# Altium PCB OrientationBoard_LIS303_LIS2DM_L3GD20.PcbDoc
Units mm, origin at the board's own origin, x right, y up, seen from the top; angles counter-clockwise.
Board outline 44 x 44 mm, 2 copper layers (Top Layer, Bottom Layer), stack 1.571 mm thick; 36 components, 25 nets, 178 pads, 35 vias.
Unrouted connection lines stored in the file: 13.
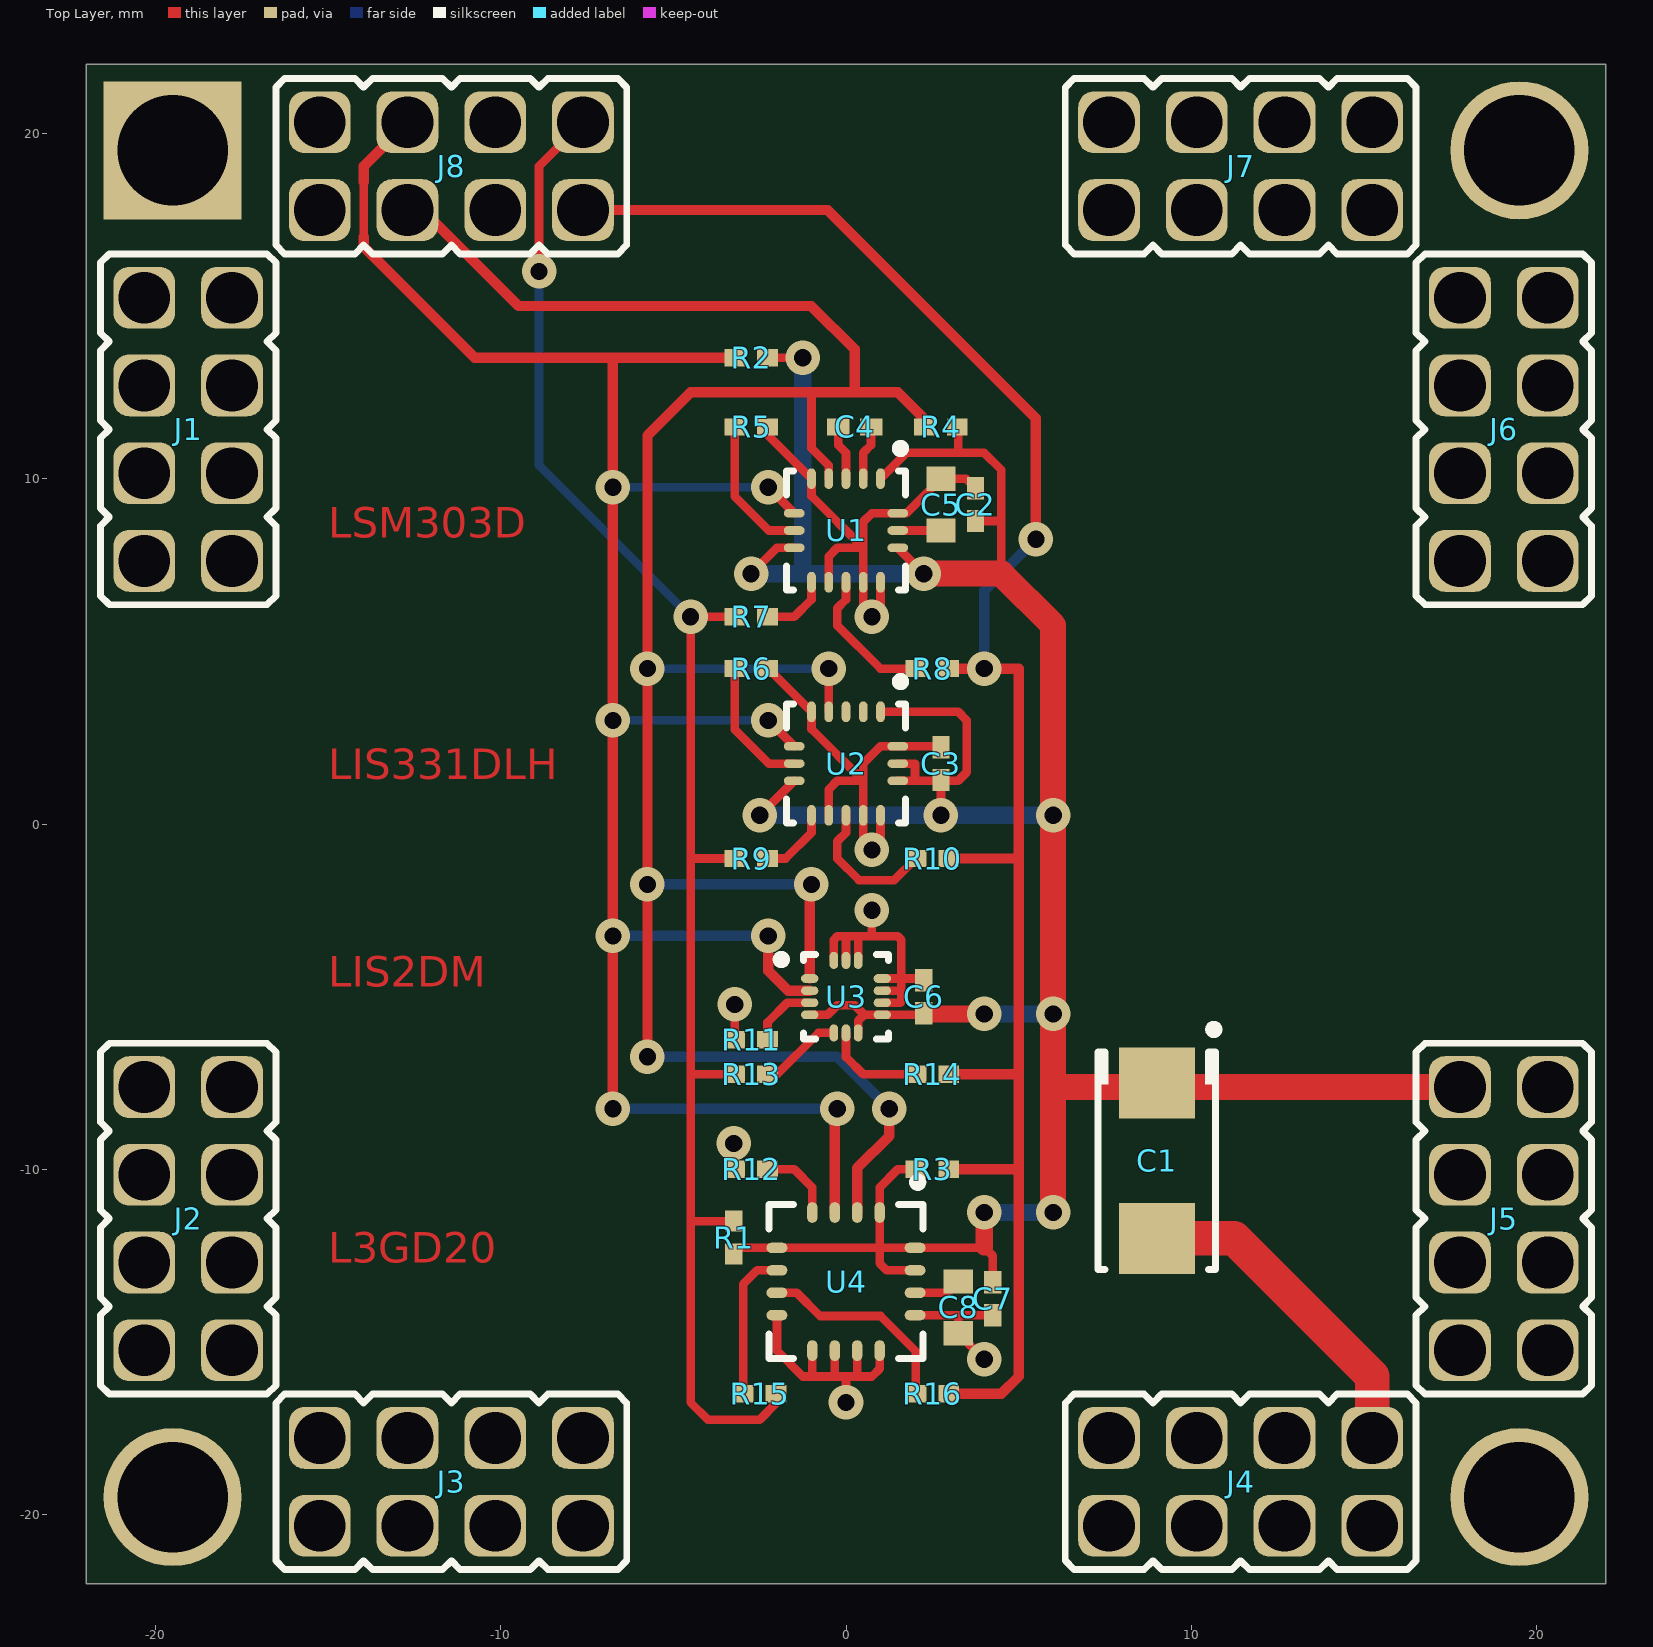
[diagram p0: Top Layer view]
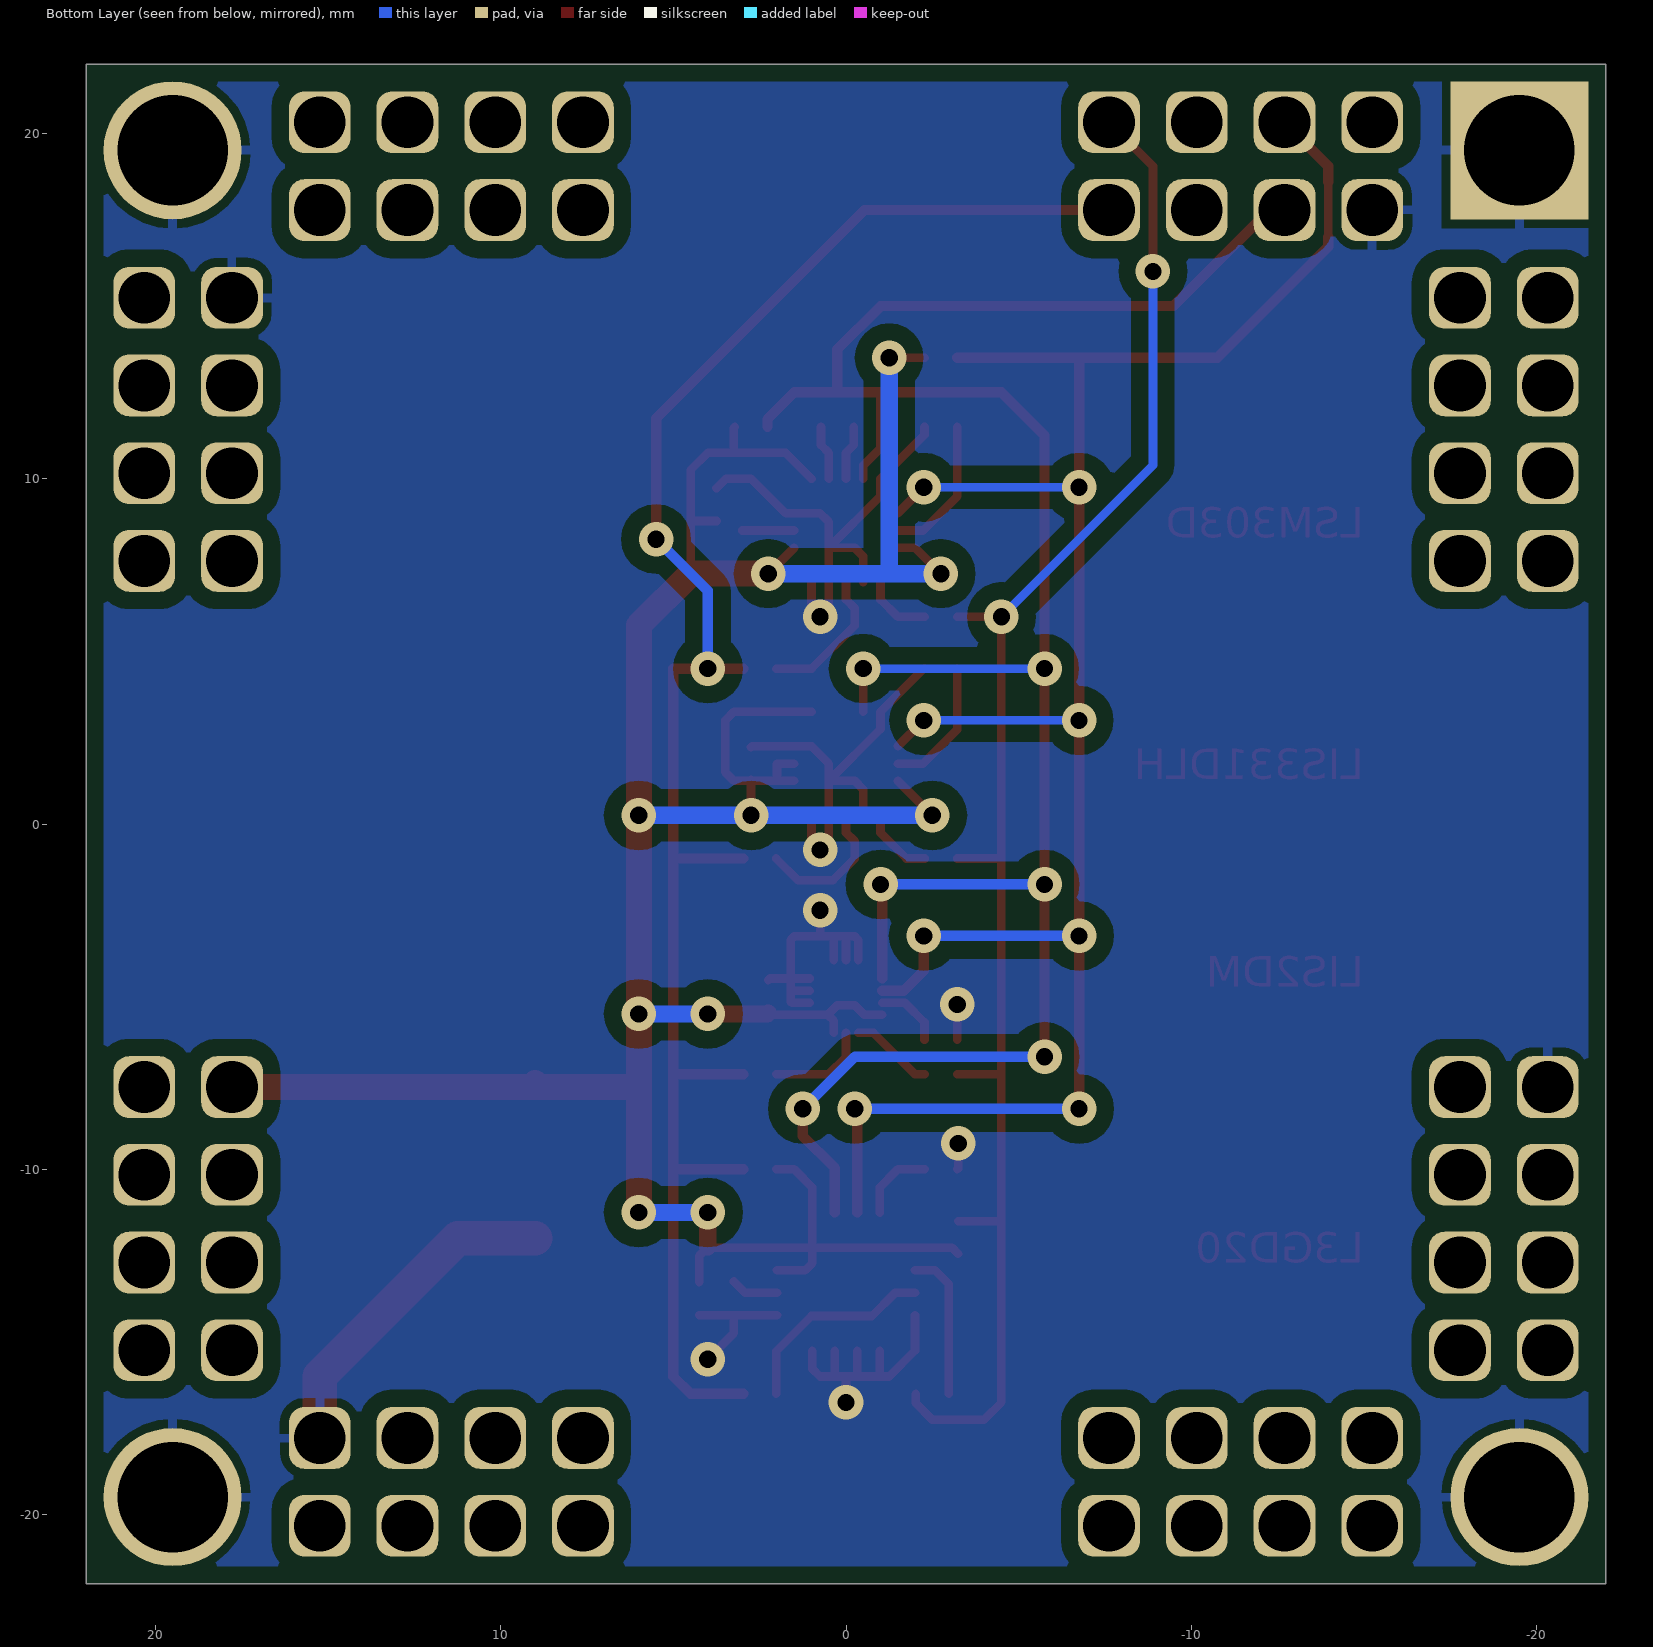
[diagram p1: Bottom Layer view, seen from below]

## Layer stack, top to bottom
Top Solder: solder mask 0.0102, Solder Resist, Dk 3.5
Top Layer: signal copper 0.0356
Dielectric 1: dielectric 1.5, FR-4, Dk 4.8
Bottom Layer: signal copper 0.0356
Bottom Solder: solder mask 0.0102, Solder Resist, Dk 3.5

## Board outline
-22,-22 -22,22 22,22 22,-22

## Design rules (kind name [scope] priority, off if disabled: settings)
Clearance Clearance_Text_Polygon(GND) [InPolygon and InNet('GND') vs IsText] p1: gap=0
Clearance Clearance_Track(GND)_Polygon(GND) [InPolygon and InNet('GND') vs IsTrack and InNet('GND')] p2: gap=0
Clearance Clearance_All_Polygon(GND) [InPolygon and InNet('GND')] p3: gap=0.5
Clearance [All] p4: gap=0.25
HoleSize [All] p1: absolutevalues=TRUE maxlimit=4 minlimit=0.3 maxpercent=80.000 minpercent=20.000
PolygonConnect PolygonConnect_Via(GND) [InNet('GND') vs IsVia] p1: connectstyle=Direct reliefconductorwidth=0.254 reliefentries=4 polygonreliefangle="90 Angle" airgapwidth=0.254
PolygonConnect [All] p2: connectstyle=Relief reliefconductorwidth=0.254 reliefentries=4 polygonreliefangle="90 Angle" airgapwidth=0.254
RoutingVias [All] p1: holewidth=0.5 width=1 viastyle="Through Hole" minholewidth=0.5 minwidth=1 maxholewidth=1.5 maxwidth=2
ShortCircuit ShortCircuit_Text_Polygon(GND) [IsText vs InPolygon and InNet('GND')] p1: allowed=TRUE
ShortCircuit [All] p2: allowed=FALSE
SolderMaskExpansion [All] p1: expansion=0.102
Width [All] p1: maxlimit=2 minlimit=0.25 preferedwidth=0.3
27 further rules are at their usual default settings.

## Components (designator, comment, footprint, x,y, rotation, side; value= is the part's Value field where it differs from the comment)
C1 "220/6.3" SMC 9,-9.75 r270 top
C2 "1.0/25" CAP0402 3.75,9.25 r270 top
C3 "1.0/25" CAP0402 2.75,1.75 r270 top
C4 "0.22/25" CAP0402 0.25,11.5 r0 top
C5 "4.7/10" CAP0603 2.75,9.25 r270 top
C6 "1.0/25" CAP0402 2.25,-5 r270 top
C7 "1.0/25" CAP0402 4.25,-13.75 r90 top
C8 "4.7/10" CAP0603 3.25,-14 r90 top
J1 "LEFT" PBDM-8 -19.05,11.43 r270 top
J2 "LEFT" PBDM-8 -19.05,-11.43 r90 top
J3 "BOTTOM" PBDM-8 -11.43,-19.05 r0 top
J4 "BOTTOM" PBDM-8 11.43,-19.05 r0 top
J5 "RIGHT" PBDM-8 19.05,-11.43 r90 top
J6 "RIGHT" PBDM-8 19.05,11.43 r90 top
J7 "TOP" PBDM-8 11.43,19.05 r180 top
J8 "TOP" PBDM-8 -11.43,19.05 r180 top
R1 "100k" RES0402 -3.25,-11.975 r270 top
R2 "10k" RES0402 -2.75,13.5 r0 top
R3 "100k" RES0402 2.5,-10 r180 top
R4 "10k" RES0402 2.75,11.5 r0 top
R5 "1k" RES0402 -2.75,11.5 r180 top
R6 "1k" RES0402 -2.75,4.5 r180 top
R7 "NC" RES0402 -2.75,6 r0 top
R8 "NC" RES0402 2.5,4.5 r180 top
R9 "NC" RES0402 -2.75,-1 r0 top
R10 "NC" RES0402 2.5,-1 r180 top
R11 "1k" RES0402 -2.75,-6.25 r0 top
R12 "1k" RES0402 -2.75,-10 r0 top
R13 "NC" RES0402 -2.75,-7.25 r0 top
R14 "NC" RES0402 2.5,-7.25 r180 top
R15 "1k" RES0402 -2.5,-16.5 r180 top
R16 "1k" RES0402 2.5,-16.5 r180 top
U1 "LSM303D" LGA16(3x3x1) 0,8.5 r270 top
U2 "LIS331DLH" LGA16(3x3x1) 0,1.75 r270 top
U3 "LIS2DM" LGA14(2x2x1) 0,-5 r0 top
U4 "L3GD20" LGA16(4x4x1) 0,-13.25 r270 top

## Footprints (in the part's own frame and the unit in brackets; to place one, negate y for a bottom-side part, rotate by r counter-clockwise, add the part's x,y. Pads: shape width x height; smd on the part's side, far side on the other; paste and mask are expansions set on the pad)
CAP0402 [mm]
  rect 0.65x0.5 smd: 1(-0.475,0) 2(0.475,0)
  body extent -0.55,-0.3 0.55,0.3, height 0.5
CAP0603 [mm]
  rect 0.7x0.85 smd: 1(-0.75,0) 2(0.75,0)
  body extent -0.8,-0.4 0.8,0.4, height 0.3
LGA14(2x2x1) [mm]
  oval 0.5x0.25 smd: 1(-1.05,0.525) 2(-1.05,0.175) 3(-1.05,-0.175) 4(-1.05,-0.525) 8(1.05,-0.525) 9(1.05,-0.175) 10(1.05,0.175) 11(1.05,0.525)
  oval 0.25x0.5 smd: 5(-0.35,-1.05) 6(0,-1.05) 7(0.35,-1.05) 12(0.35,1.05) 13(0,1.05) 14(-0.35,1.05)
  silkscreen extent -2,-1.22 1.22,1.23, body extent -1.08,-1.07 1.07,1.08, height 1
LGA16(3x3x1) [mm] "16-pin Land Grid Array Package, 3x3x1 mm"
  oval 0.6x0.25 smd: 1(-1.5,1) 2(-1.5,0.5) 3(-1.5,0) 4(-1.5,-0.5) 5(-1.5,-1) 9(1.5,-1) 10(1.5,-0.5) 11(1.5,0) 12(1.5,0.5) 13(1.5,1)
  oval 0.25x0.6 smd: 6(-0.5,-1.5) 7(0,-1.5) 8(0.5,-1.5) 14(0.5,1.5) 15(0,1.5) 16(-0.5,1.5)
  silkscreen extent -2.5,-1.73 1.73,1.73, body extent -1.58,-1.58 1.58,1.58, height 1
LGA16(4x4x1) [mm]
  oval 0.6x0.3 smd: 1(-2,0.975) 2(-2,0.325) 3(-2,-0.325) 4(-2,-0.975) 9(2,-0.975) 10(2,-0.325) 11(2,0.325) 12(2,0.975)
  oval 0.3x0.6 smd: 5(-0.975,-2) 6(-0.325,-2) 7(0.325,-2) 8(0.975,-2) 13(0.975,2) 14(0.325,2) 15(-0.325,2) 16(-0.975,2)
  silkscreen extent -3,-2.22 2.22,2.23, body extent -2.08,-2.07 2.07,2.08, height 1
PBDM-8 [mm] "5-pin interboard connector, pitch 2.54 mm"
  rrect50% 1.79x1.79 hole 1.5: 1(-3.81,-1.27) 2(-3.81,1.27) 3(-1.27,-1.27) 4(-1.27,1.27) 5(1.27,-1.27) 6(1.27,1.27) 7(3.81,-1.27) 8(3.81,1.27)
  silkscreen extent -5.08,-2.54 5.08,2.54, body extent -5.08,-2.54 5.08,2.54, height 3
RES0402 [mm]
  rect 0.6x0.5 smd: 1(-0.475,0) 2(0.475,0)
  body extent -0.53,-0.28 0.53,0.28, height 0.35
SMC [mm] "Surface mount package, size C"
  rect 2.05x2.2 smd: 1(2.25,0) 2(-2.25,0)
  silkscreen extent -3.92,-1.7 3.15,1.78, body extent -3,-1.6 3,1.6, height 2.8

## Part data
C1: library part TAJC, "Standard tantalum SMT capacitor, size C"
C2 C3 C4 C6 C7: library part CAP0402, "Ceramic chip capacitor 0402"
C5 C8: library part CAP0603, "Ceramic chip capacitor 0603"
J1 J2 J3 J4 J5 J6 J7 J8: library part PBDM-8, "2x4-pin header, pitch 2.54 mm"
R1 R2 R3 R4 R5 R6 R7 R8 R9 R10 R11 R12 R13 R14 R15 R16: library part RES0402, "Ceramic chip resistor"
U1: "Ultra-compact high-performance eCompass module: 3D accelerometer and 3D magnetometer"
U2: "MEMS digital output motion sensor ultra low-power high performance 3-axes “nano” accelerometer"
U3: "MEMS digital output motion sensor: ultra low-power high performance 3-axis “femto” accelerometer"
U4: "MEMS motion sensor: three-axis digital output gyroscope"

## Free pads (board coordinates)
  round 4 hole 3.2: 0(-19.5,-19.491) 0(19.5,-19.491) 0(19.5,19.509)
  rect 4x4 hole 3.2: 0(-19.5,19.509)

## Via types
v1: diameter 1, hole 0.5, Top Layer to Bottom Layer, 35 vias

## Nets (pads, with @x,y where several pads share a name; then routed paths per layer and width w, separated by ;. In a path a pad name is that pad's centre, name@x,y a point inside that pad or via, vN(x,y) a via of type N, cw(c..) or ccw(c..) an arc to the next point about the centre after c; other vN are vias at no path point)
+5V: J1.6 J3.6 J5.6 J7.6
+12V: J1.2 J3.2 J5.2 J7.2
GND: C1.1 C2.1 C3.1 C5.1 C6.1 C7.1 C8.1 J2.8 J4.8 J6.8 J8.8 pad.0 R5.1 R6.1 R11.1 R12.1 U1.5 U1.10 U1.12 U1.13 U1.16 U2.5 U2.10 U2.12 U2.13 U2.16 U3.5 U3.9 U3.10 U3.11 U3.12 U3.13 U3.14 U4.8 U4.9 U4.10 U4.11 U4.12 U4.13 | length 58.9
  Top Layer w0.25: v1(-3.25,-9.25) -3.25,-9.975 R12.1 ; R11.1 v1(-3.225,-5.225) ; R6.1 -2.25,4.5 U2.5 -1,2.75 0.5,1.25 ; R5.1 -2.275,11.275 U1.5 -1,9.5 0.5,8 ; U4.8 -2,-15.25 -1.25,-16 -0.975,-16 ; U4.9 -0.975,-16 ; U2.10 -0.5,1 -0.25,1.25 0.5,1.25 ; U1.10 -0.5,7.75 -0.25,8 0.5,8 ; U3.14 -0.35,-3.35 -0.25,-3.25 0,-3.25 ; U4.10 -0.325,-16 ; v1(0,-16.75) 0,-16 ; U3.13 0,-3.25 ; U4.11 0.325,-16 ; U3.12 0.35,-3.25 ; v1(0.75,-2.5) 0.75,-3.25 ; U4.12 0.975,-15.775 0.75,-16 0.325,-16 ; U2.13 1,-0.5 v1(0.75,-0.75) 0.5,-0.5 U2.12 0.5,1.25 ; U1.13 1,6.25 v1(0.75,6) 0.5,6.25 U1.12 0.5,8 ; U3.9 1.575,-5.175 1.6,-5.15 1.6,-4.825 ; U3.10 1.6,-4.825 ; U3.11 1.6,-4.475 ; U4.13 3.25,-14.225 ; C6.1 2.2,-4.475 1.6,-4.475 ; C3.1 2.725,2.25 U2.16 1,2.25 0.5,1.75 0.5,1.25 ; C2.1 3.475,10 C5.1 1.75,9 U1.16 0.75,9 0.5,8.75 0.5,8 ; v1(4,-15.5) C8.1 3.25,-14.225 ; C7.1 3.25,-14.225 ; -0.975,-16 -0.325,-16 ; -0.325,-16 0,-16 ; 0,-16 0.325,-16 ; 0,-3.25 0.35,-3.25 ; 0.35,-3.25 0.75,-3.25 ; 0.75,-3.25 1.5,-3.25 1.6,-3.35 1.6,-4.475 ; 1.6,-4.825 1.6,-4.475
  Top Layer w1: C1.1 11.25,-12 15.24,-15.99 J4.8
INT1: J8.2 R3.1 R8.1 R10.1 R14.1 R16.1 | length 54.3
  Top Layer w0.3: J8.2 -0.53,17.78 5.5,11.75 v1(5.5,8.25) ; R16.1 4.5,-16.5 5,-16 5,-10 ; R3.1 5,-10 ; R14.1 5,-7.25 ; R10.1 5,-1 ; R8.1 5,4.5 5,-1 ; 5,-10 5,-7.25 ; 5,-7.25 5,-1
  Bottom Layer w0.3: v1(4,4.5) 4,6.75 v1(5.5,8.25)
INT2: J8.1 R1.1 R7.1 R9.1 R13.1 R15.1 | length 47.6
  Top Layer w0.25: v1(-8.89,16.002) -8.89,19.05 J8.1 ; R1.1 -4.5,-11.5 ; R13.1 -4.5,-7.25 ; R9.1 -4.5,-1 ; R7.1 v1(-4.5,6) -4.5,-1 ; R15.1 -2.025,-16.775 -2.5,-17.25 -4,-17.25 -4.5,-16.75 -4.5,-11.5 ; -4.5,-11.5 -4.5,-7.25 ; -4.5,-7.25 -4.5,-1
  Bottom Layer w0.25: v1(-8.89,16.002) -8.89,10.39 v1(-4.5,6)
NetC4_1: C4.1 U1.3 | length 1.6
  Top Layer w0.25: C4.1 -0.225,10.975 0,10.75 U1.3
NetC4_2: C4.2 U1.2 | length 1.6
  Top Layer w0.25: U1.2 0.5,10.75 0.725,10.975 C4.2
NetC5_2: C5.2 U1.15 | length 1.5
  Top Layer w0.25: U1.15 C5.2@3,8.5
NetC8_2: C8.2 U4.14 | length 1.4
  Top Layer w0.25: U4.14 2.925,-13.575 C8.2
NetR5_2: R5.2 U1.7 | length 4.1
  Top Layer w0.25: R5.2 -3.225,9.488 -2.237,8.5 U1.7
NetR6_2: R6.2 U2.7 | length 3.9
  Top Layer w0.25: R6.2 -3.225,2.738 -2.237,1.75 U2.7
NetR7_2: R7.2 U1.9 | length 2
  Top Layer w0.25: R7.2 -1.5,6 -1,6.5 U1.9
NetR8_2: R8.2 U1.11 | length 4.1
  Top Layer w0.25: U1.11 0,6.5 -0.25,6.25 -0.25,5.75 1,4.5 R8.2
NetR9_2: R9.2 U2.9 | length 2.1
  Top Layer w0.25: R9.2 -1.75,-1 -1,-0.25 U2.9
NetR10_2: R10.2 U2.11 | length 4.1
  Top Layer w0.25: U2.11 0,-0.25 -0.25,-0.5 -0.25,-1 0.375,-1.625 0.388,-1.625 1.4,-1.625 R10.2
NetR11_2: R11.2 U3.3 | length 2
  Top Layer w0.25: R11.2 -2.275,-5.75 -1.7,-5.175 U3.3
NetR12_2: R12.2 U4.4 | length 2.2
  Top Layer w0.25: R12.2 -1.5,-10 -0.975,-10.525 U4.4
NetR13_2: R13.2 | length 2.4
  Top Layer w0.25: R13.2 -2,-7.25 -0.8,-6.05 -0.35,-6.05
NetR14_2: R14.2 U3.6 | length 2.9
  Top Layer w0.25: U3.6 0,-6.75 0.5,-7.25 R14.2
NetR15_2: R15.2 U4.6 | length 4.3
  Top Layer w0.25: R15.2 -2.975,-13.325 -2.575,-12.925 U4.6
NetR16_2: R16.2 U4.7 | length 6
  Top Layer w0.25: U4.7 -1.425,-13.575 -0.75,-14.25 1,-14.25 2.025,-15.275 R16.2
SCL: J8.6 R4.1 U1.4 U2.4 U3.1 U4.2 | length 70.2
  Top Layer w0.25: -1,12.5 -1,10.882 -0.5,10.382 U1.4 ; U2.4 v1(-0.5,4.5)
  Top Layer w0.3: J8.6 -12.254,17.78 -9.474,15 -1,15 0.25,13.75 0.25,12.5 ; v1(-5.75,-6.741) -5.75,-2.25 ; v1(-5.75,-1.75) v1(-5.75,4.5) -5.75,11.25 -4.5,12.5 -1,12.5 0.25,12.5 ; U3.1 -1.05,-1.8 v1(-1,-1.75) ; U4.2 0.325,-9.962 1.25,-9.037 v1(1.25,-8.25) ; R4.1 2.275,11.725 1.5,12.5 0.25,12.5
  Bottom Layer w0.25: v1(-5.75,4.5) v1(-0.5,4.5)
  Bottom Layer w0.3: v1(-5.75,-6.741) -0.259,-6.741 v1(1.25,-8.25) ; v1(-5.75,-1.75) v1(-1,-1.75)
SDA: J8.5 R2.1 U1.6 U2.6 U3.2 U4.3 | length 65.6
  Top Layer w0.25: -13.97,17 -13.97,18.604 ; v1(-2.25,3) U2.6 ; v1(-2.25,9.75) U1.6
  Top Layer w0.3: -13.97,17 -13.97,16.72 -10.75,13.5 -6.75,13.5 ; -13.97,18.604 -13.97,19.05 J8.5 ; v1(-6.75,-8.25) v1(-6.75,-3.241) v1(-6.75,3) v1(-6.75,9.75) -6.75,13.5 ; R2.1 -6.75,13.5 ; v1(-2.25,-3.241) -2.25,-4.25 -1.675,-4.825 U3.2 ; U4.3 -0.325,-8.325 v1(-0.25,-8.25)
  Bottom Layer w0.25: v1(-6.75,3) v1(-2.25,3) ; v1(-6.75,9.75) v1(-2.25,9.75)
  Bottom Layer w0.3: v1(-6.75,-8.25) v1(-0.25,-8.25) ; v1(-6.75,-3.241) v1(-2.25,-3.241)
VBAT: J1.4 J3.4 J5.4 J7.4
VCC: C1.2 C2.2 C3.2 C6.2 C7.2 J1.8 J3.8 J5.8 J7.8 R1.2 R2.2 R3.2 R4.2 U1.1 U1.8 U1.14 U2.1 U2.8 U2.14 U2.15 U3.4 U3.7 U3.8 U4.1 U4.5 U4.15 U4.16 | length 98.7
  Top Layer w0.25: R1.2 -3.075,-12.275 U4.5 0.975,-12.275 ; v1(-2.75,7.25) -2,8 U1.8 ; v1(-2.5,0.25) U2.8 ; R2.2 v1(-1.25,13.5) ; U3.4 -0.525,-5.525 -0.25,-5.25 0.25,-5.25 0.525,-5.525 ; U3.7 0.35,-5.7 0.525,-5.525 ; U2.1 3.25,3.25 3.5,3 3.5,1.5 3.25,1.25 C3.2@2.75,1.25 ; U1.1 1.75,10.75 3.25,10.75 ; U2.14 2.725,1.25 C3.2@2.75,1.25 ; U2.15 2,1.75 2,1.25 ; U1.14 v1(2.25,7.25) ; U4.15 1.175,-12.925 0.975,-12.725 0.975,-12.275 ; R3.2 1.5,-10 0.975,-10.525 U4.1 0.975,-12.275 ; C6.2@2.2,-5.525 U3.8 0.525,-5.525 ; v1(2.75,0.25) C3.2@2.75,1.25 ; C3.2 C3.2@2.75,1.25 ; R4.2 3.25,11.475 3.25,10.75 ; C2.2 4.475,8.775 4.5,8.75 ; C7.2 4.25,-12.5 4.025,-12.275 U4.16 0.975,-12.275 ; 4.5,7.25 4.5,8.75 ; 3.25,10.75 4,10.75 4.5,10.25 4.5,8.75
  Top Layer w0.5: C6.2 2.275,-5.5 v1(4,-5.5) ; 4,-12.25 v1(4,-11.25)
  Top Layer w0.75: v1(2.25,7.25) 4.5,7.25 6,5.75 v1(6,0.25) v1(6,-5.5) 6,-7.62 ; v1(6,-11.25) 6,-7.62 ; C1.2 C1.2@9,-7.62 ; J5.8 C1.2@9,-7.62 ; 6,-7.62 C1.2@9,-7.62
  Bottom Layer w0.5: v1(-2.75,7.25) -1.25,7.25 ; v1(-2.5,0.25) v1(2.75,0.25) v1(6,0.25) ; v1(-1.25,13.5) -1.25,7.25 ; v1(2.25,7.25) -1.25,7.25 ; v1(4,-11.25) v1(6,-11.25) ; v1(4,-5.5) v1(6,-5.5)
pads on no net: J1.1 J1.3 J1.5 J1.7 J2.1 J2.2 J2.3 J2.4 J2.5 J2.6 J2.7 J3.1 J3.3 J3.5 J3.7 J4.1 J4.2 J4.3 J4.4 J4.5 J4.6 J4.7 J5.1 J5.3 J5.5 J5.7 J6.1 J6.2 J6.3 J6.4 J6.5 J6.6 J6.7 J7.1 J7.3 J7.5 J7.7 J8.3 J8.4 J8.7 U2.2 U2.3

## Polygon pours and split planes (outlines as drawn)
GND on Bottom Layer "Bottom-GND" (solid, remove dead copper, pour order 2): -21.5,21.5 21.5,21.5 21.5,-21.5 -21.5,-21.5

## Other copper
Top Layer:
  text "LSM303D" at -15,8 h1.52
  text "LIS331DLH" at -15,1 h1.52
  text "LIS2DM" at -15,-5 h1.52
  text "L3GD20" at -15,-13 h1.52

## Silkscreen, mask and mechanical layers (free items; w line width, h text height)
Board:
  the board outline again, w0.2